# Altium PCB Beetech NanoEvery.PcbDoc
Units mm, origin at the board's own origin, x right, y up, seen from the top; angles counter-clockwise.
Board outline 67.5 x 47.7 mm, 2 copper layers (Top Layer, Bottom Layer), stack 1.671 mm thick; 17 components, 22 nets, 113 pads, 19 vias.
Unrouted connection lines stored in the file: 173.
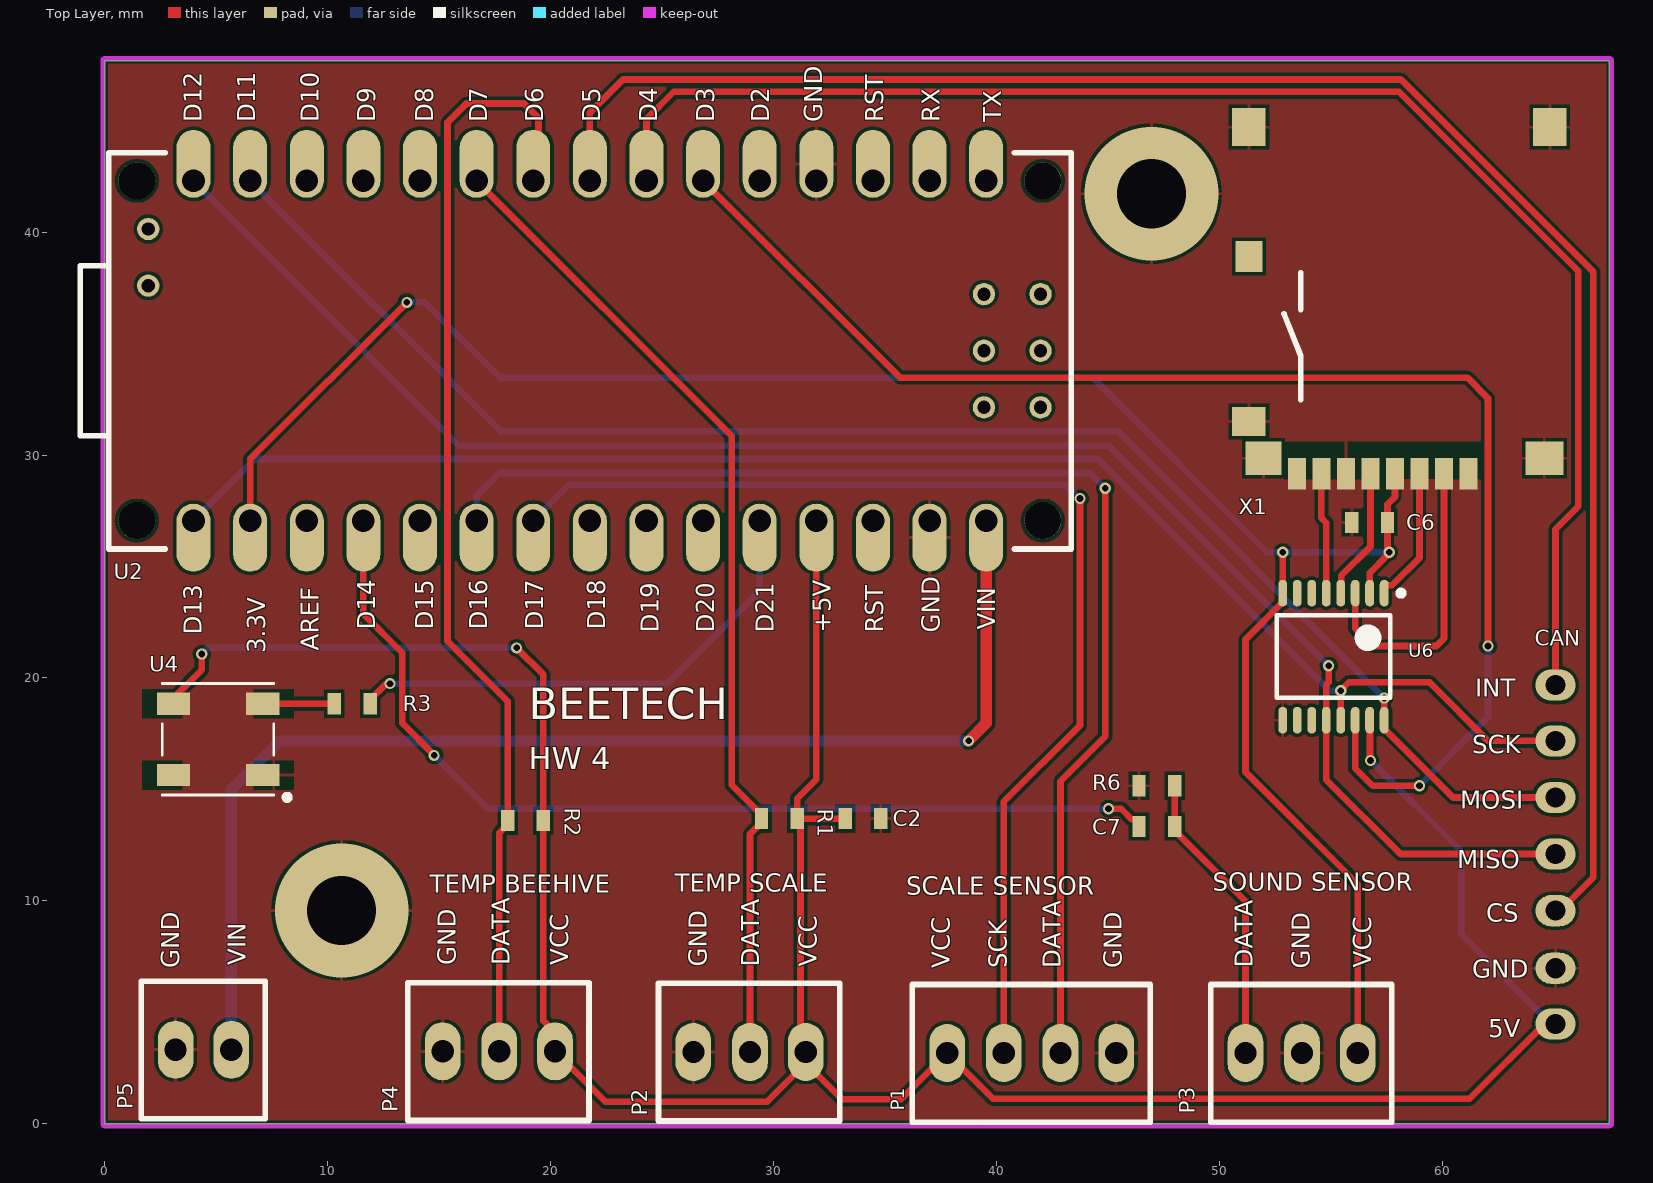
[diagram p0: Top Layer view]
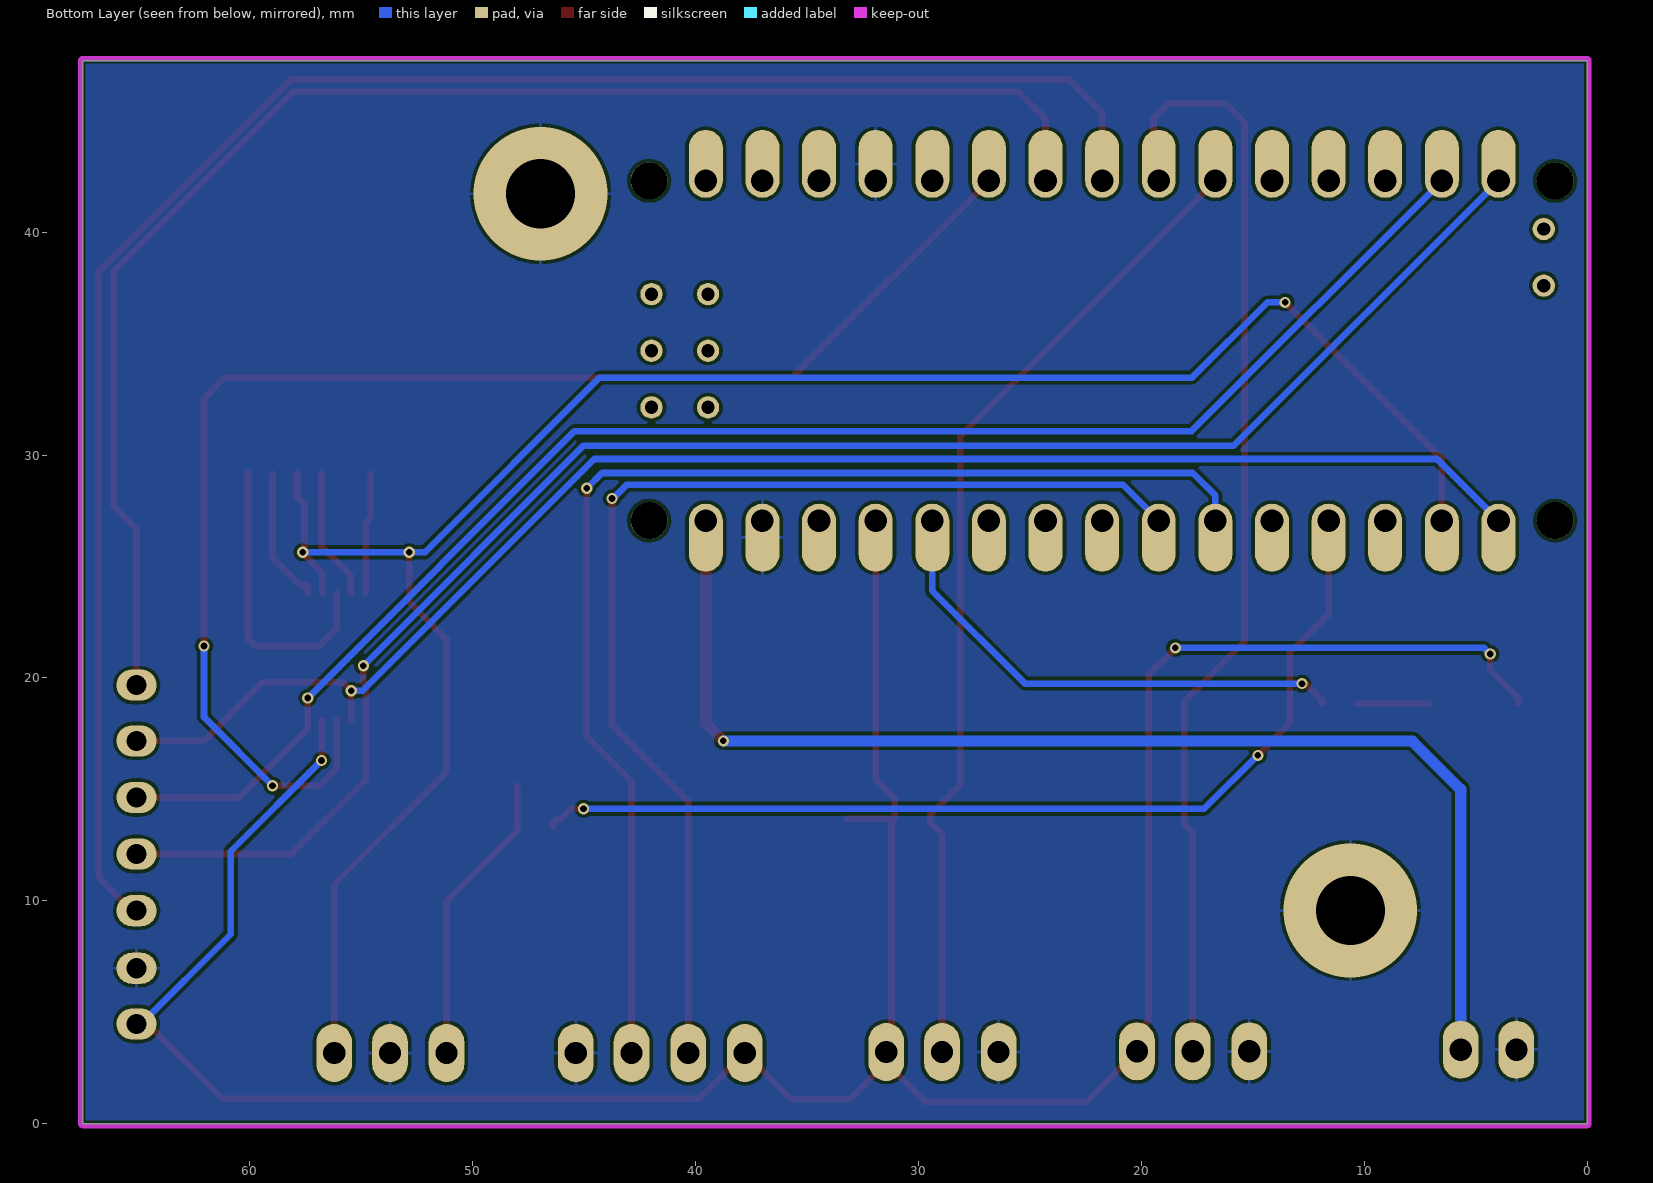
[diagram p1: Bottom Layer view, seen from below]

## Layer stack, top to bottom
Top Solder: solder mask 0.0102, Solder Resist, Dk 3.5
Top Layer: signal copper 0.0356
Dielectric1: core 1.6, FR-4, Dk 4.8
Bottom Layer: signal copper 0.0356
Bottom Solder: solder mask 0.0102, Solder Resist, Dk 3.5

## Board outline
0,0 67.5,0 67.5,47.7 0,47.7

## Design rules (kind name [scope] priority, off if disabled: settings)
Clearance Clearance_1 [InNamedPolygon('SW_L01_P024')] p1: gap=0.254 ignorepadtopadclearanceinfootprint=FALSE except(0: Arc-Hole Track-Hole SMDPad-Hole THPad-Hole Via-Hole Fill-Hole Poly-Hole Region-Hole Text-Hole)
Clearance [All] p2: gap=0.15 ignorepadtopadclearanceinfootprint=FALSE
ComponentClearance [All] p1: gap=0.001 collisioncheckmode=3 verticalgap=0.254 showdistances=FALSE
FabricationTestPointUsage [All] p1 off: valid=0 allowmultiple=FALSE
FabricationTestpoint [All] p1 off: side=3 testpointundercomponent=TRUE minsize=1.016 maxsize=2.54 preferedsize=1.524 minholesize=0 maxholesize=1.016 preferedholesize=0.813 testpointgrid=0.025 allowsidetop=TRUE allowsidebottom=TRUE usegrid=TRUE gridtolerance=0
HoleSize [All] p1: absolutevalues=TRUE maxlimit=6 minlimit=0.025 maxpercent=80.000 minpercent=20.000
HoleToHoleClearance [All] p1: gap=0 allowstackedmicrovias=TRUE
MinimumSolderMaskSliver [All] p1: minsoldermaskwidth=0
PolygonConnect PolygonConnect_14 [All vs IsNamedPolygon('GND_L01_P041')] p1: connectstyle=Relief reliefconductorwidth=0.15 reliefentries=4 polygonreliefangle="90 Angle" airgapwidth=0.15
PolygonConnect V_BAT_L01_P036 [All vs IsNamedPolygon('V_BAT_L01_P036')] p2: connectstyle=Direct reliefconductorwidth=0.254 reliefentries=4 polygonreliefangle="90 Angle" airgapwidth=0.254
PolygonConnect V_BAT2 [All vs IsNamedPolygon('V_BAT2_L01_P004')] p3: connectstyle=Direct reliefconductorwidth=0.254 reliefentries=4 polygonreliefangle="90 Angle" airgapwidth=0.254
PolygonConnect V_BAT [All vs IsNamedPolygon('V_BAT_L01_P010')] p4: connectstyle=Direct reliefconductorwidth=0.254 reliefentries=4 polygonreliefangle="90 Angle" airgapwidth=0.254
PolygonConnect V_SYS2 [All vs IsNamedPolygon('V_SYS2_L01_P012')] p5: connectstyle=Direct reliefconductorwidth=0.254 reliefentries=4 polygonreliefangle="90 Angle" airgapwidth=0.254
PolygonConnect +3.3b_uBlox [All vs IsNamedPolygon('+3.3V_UBLOX_L01_P014')] p6: connectstyle=Direct reliefconductorwidth=0.254 reliefentries=4 polygonreliefangle="90 Angle" airgapwidth=0.254
PolygonConnect V_LIPO_SYS_L01_P016 [All vs IsNamedPolygon('V_LIPO_SYS_L01_P016')] p7: connectstyle=Direct reliefconductorwidth=0.254 reliefentries=4 polygonreliefangle="90 Angle" airgapwidth=0.254
PolygonConnect V_LIPO_SYS_L01_P020 [All vs IsNamedPolygon('V_LIPO_SYS_L02_P020')] p8: connectstyle=Direct reliefconductorwidth=0.254 reliefentries=4 polygonreliefangle="90 Angle" airgapwidth=0.254
PolygonConnect V_SYS_L02_P024 [All vs IsNamedPolygon('V_SYS_L02_P024')] p9: connectstyle=Direct reliefconductorwidth=0.254 reliefentries=4 polygonreliefangle="90 Angle" airgapwidth=0.254
PolygonConnect VCC_USB_5.0V_L01_P026 [All vs IsNamedPolygon('VCC_USB_5.0V_L01_P026')] p10: connectstyle=Direct reliefconductorwidth=0.254 reliefentries=4 polygonreliefangle="90 Angle" airgapwidth=0.254
PolygonConnect SW [All vs IsNamedPolygon('SW_L01_P008')] p11: connectstyle=Direct reliefconductorwidth=0.254 reliefentries=4 polygonreliefangle="90 Angle" airgapwidth=0.254
PolygonConnect [All] p12: connectstyle=Relief reliefconductorwidth=0.15 reliefentries=4 polygonreliefangle="90 Angle" airgapwidth=0.15
RoutingVias [All] p1: holewidth=0.3 width=0.5 viastyle="Through Hole" minholewidth=0.2 minwidth=0.3 maxholewidth=1.2 maxwidth=2 useviatemplates=TRUE viatemplateguid#1={68F519FB-439D-452A-8ACF-2DE296BA9197} viatemplateguid#2={5ED9683F-E5DF-4E78-BDB1-49E541A8EC46} viatemplateguid#3={FAFF2F81-81C9-46E2-9D3D-D8AEF9417303} viatemplateguid#4={175E6F9D-763D-42D4-A59E-C21ACC7DA2E1} viatemplatename#1=v50h30m0mx0 viatemplatename#2=v50h30m50mx0 viatemplatename#3=v50h20 viatemplatename#4=v50h20mx0
SilkToSilkClearance [All] p1: silktosilkclearance=0.152
SilkToSolderMaskClearance [IsPad] p1: minsilkscreentomaskgap=0.127 clearancetoexposedcopper=TRUE
SolderMaskExpansion [All] p1: expansion=0.102 istentingtop=FALSE
Width [All] p1: maxlimit=5.08 minlimit=0.01 preferedwidth=0.305 minimp=50.000000 maximp=50.000000 favimp=50.000000
22 further rules are at their usual default settings.

## Components (designator, comment, footprint, x,y, rotation, side; value= is the part's Value field where it differs from the comment)
C2 "100nF 0603_1" "CAP 0603" 34.011,13.691 r180 top value=100nF
C6 "10uF 0603" "CAP 0603" 56.743,26.975 r0 top value=10uF
C7 "100nF 0603" "CAP 0603" 47.193,13.335 r0 top value=100nF
CAN "8-Pin" 7PIN 65.075,4.48 r180 top locked (schematic designator P7)
P1 "4-Pin Right Angle Housing" "4PIN - RND 205-EK254-2.54-04P" 45.369,3.175 r270 top
P2 "3-Pin Right Angle Housing" "3PIN - RND 205-EK254-2.54-03P" 31.444,3.225 r270 top
P3 "3-Pin Right Angle Housing" "3PIN - RND 205-EK254-2.54-03P" 56.209,3.175 r270 top
P4 "3-Pin Right Angle Housing" "3PIN - RND 205-EK254-2.54-03P" 20.197,3.25 r270 top
P5 "2-Pin Right Angle Housing" "2PIN - RND 205-EK254-2.54-02P" 5.675,3.327 r270 top
R1 "4.7k Ohm 0603" "RES 0603 FOOTPRINT" 30.261,13.691 r180 top value=4.7k
R2 "4.7k Ohm 0603" "RES 0603 FOOTPRINT" 18.875,13.6 r180 top value=4.7k
R3 "470 Ohm 0603" "RES 0603 FOOTPRINT" 11.1,18.847 r180 top value=470
R6 "20k Ohm 0603" "RES 0603 FOOTPRINT" 47.193,15.164 r0 top value=20k
U2 "Arduino Nano Every" "Arduino Nano Every" 0.17,25.79 r0 top locked
U4 "neoPixel" "neoPixel 5050 adafruit 1655" 5.08,17.247 r0 top
U6 "TXB0106" TSSOP-16L 55.118,20.955 r270 top locked
X1 "SD micro Card Holder_2" "SD Card Holder - micro - 2 - sd Card inserted" 52.077,45.559 r0 top locked

## Footprints (in the part's own frame and the unit in brackets; to place one, negate y for a bottom-side part, rotate by r counter-clockwise, add the part's x,y. Pads: shape width x height; smd on the part's side, far side on the other; paste and mask are expansions set on the pad)
"2PIN - RND 205-EK254-2.54-02P" [mm] "RND 205-EK254-2.54-02P"
  oval 2.6x1.6 hole 1: 1(0,0) 2(0,-2.5)
  silkscreen extent -3.07,-4.04 3.1,1.52, body extent -3.1,-3.99 3.1,1.55, height 8.51
"3PIN - RND 205-EK254-2.54-03P" [mm] "RND 205-EK254-2.54-03P"
  oval 2.6x1.6 hole 1: 1(0,0) 2(0,-2.5) 3(0,-5.04)
  silkscreen extent -3.07,-6.6 3.1,1.52, body extent -3.1,-6.55 3.1,1.53, height 8.51
"4PIN - RND 205-EK254-2.54-04P" [mm] "RND 205-EK254-2.54-04P"
  oval 2.6x1.6 hole 1: 1(0,0) 2(0,-2.5) 3(0,-5.04) 4(0,-7.58)
  silkscreen extent -3.07,-9.14 3.1,1.52, body extent -3.1,-9.1 3.1,1.52, height 8.51
7PIN [mm]
  oval 1.8x1.4 hole 0.9: 1(0,0) 2(0,-2.5) 3(0,-5.08) 4(0,-7.62) 5(0,-10.16) 6(0,-12.7) 7(0,-15.2)
"Arduino Nano Every" [mil] "Arduino Nano Every"
  oval 60x120 hole 40 copper offset 0,-30: 1(150,50) 2(250,50) 3(350,50) 4(450,50) 5(550,50) 6(650,50) 7(750,50) 8(850,50) 9(950,50) 10(1050,50) 11(1150,50) 12(1250,50) 13(1350,50) 14(1450,50) 15(1550,50)
  oval 60x120 hole 40 copper offset 0,30: 16(1550,650) 16(1550,650) 17(1450,650) 18(1350,650) 19(1250,650) 20(1150,650) 21(1050,650) 22(950,650) 23(850,650) 24(750,650) 25(650,650) 26(550,650) 27(450,650) 28(350,650) 29(250,650) 30(150,650)
  round 39.37 hole 23.62: 50(70,565) 51(70,465) 61(1545.98,250) 62(1645.98,250) 63(1545.98,350) 64(1645.98,350) 65(1545.98,450) 66(1645.98,450)
  round 65 hole 65 unplated: MH1(50,650) MH2(50,50) MH3(1650,50) MH4(1650,650)
  silkscreen extent -50,0 1700,700, body extent -40,0 1700,700, height 136
"CAP 0603" [mm] "CAP 0603"
  rect 0.6x0.95 smd: 1(-0.8,0) 2(0.8,0)
  body extent -0.8,-0.4 0.8,0.4, height 0.8
"neoPixel 5050 adafruit 1655" [mm] "neoPixel 5050 adafruit 1655"
  rect 1.5x1 smd: 1(2,-1.6) 2(2,1.6) 3(-2,1.6) 4(-2,-1.6)
  silkscreen extent -2.5,-2.72 3.22,2.5, body extent -2.5,-2.5 2.5,2.5, height 2
"RES 0603 FOOTPRINT" [mm] "RES 0603 FOOTPRINT"
  rect 0.6x0.95 smd: 1(-0.8,0) 2(0.8,0)
  body extent -0.8,-0.4 0.8,0.4, height 0.8
"SD Card Holder - micro - 2 - sd Card inserted" [mm] "micro SD Card holder, Molex Part Number:   502774-0891"
  rect 0.8x1.4 smd: 1(9.1,-16.4) 2(8,-16.4) 3(6.9,-16.4) 4(5.8,-16.4) 5(4.7,-16.4) 6(3.6,-16.4) 7(2.5,-16.4) 8(1.4,-16.4)
  rect 1.2x1.4 smd: 10(-0.75,-6.65)
  rect 1.5x1.3 smd: 20(-0.75,-14.05)
  rect 1.5x1.7 smd: 20(-0.75,-0.85) 20(12.75,-0.85)
  rect 1.6x1.5 smd: 20(-0.1,-15.7)
  rect 1.7x1.5 smd: 20(12.5,-15.7)
  silkscreen extent 0.82,-13.08 1.57,-7.37, body extent -1,-16.1 13.3,2.2, height 1.81
TSSOP-16L [mm] "TSOP, 16-Leads, Body 5,00x4,40mm, Pitch 0,65mm, IPC High Density"
  oval 1.2x0.4 smd: 1(-2.85,2.275) 2(-2.85,1.625) 3(-2.85,0.975) 4(-2.85,0.325) 5(-2.85,-0.325) 6(-2.85,-0.975) 7(-2.85,-1.625) 8(-2.85,-2.275) 9(2.85,-2.275) 10(2.85,-1.625) 11(2.85,-0.975) 12(2.85,-0.325) 13(2.85,0.325) 14(2.85,0.975) 15(2.85,1.625) 16(2.85,2.275)
  silkscreen extent -2.97,-2.55 1.85,3.15, body extent -2.25,-2.55 2.25,2.55, height 1.2

## Part data
C2 C6 C7: "C CERAMIC SMD", Bezeichnung="C SMD", Haendler=Mouser, housing/footprint=0603
  C2: Haendler Nr=603-CC0603JPX79BB104, Hersteller=Yageo, Hersteller Nr=CC0603JPX7R9BB104, Preis (CHF)=0.15, Umax=50V
  C6: Dielektrikum=X5R, Haendler Nr=810-C1608X5R1A106K, Hersteller=TDK, Hersteller Nr=C1608X5R1A106K080AC, Preis (CHF)=0.5, Umax=10V
  C7: Haendler Nr=710-885012206020, Hersteller=Würth, Hersteller Nr=885012206020, Preis (CHF)=0.05, Umax=10V
CAN: library part 7-Pin, LatestRevisionDate=17-Jul-2002, LatestRevisionNote="Re-released for DXP Platform.", Publisher="Altium Limited"
P1: library part "4-Pin Screw Terminal", "4-Pin", ComponentLink1Description=Mouser, ComponentLink1URL=https://www.mouser.ch/ProductDetail/TE-Connectivity/640453-2?qs=sGAEpiMZZMs%252bGHln7q6pm5E1Eb6qwPl2KIU5TYv3tVY%3d, Haendler=Distrelec, Haendler Nr=301-27-920, Hersteller=RND, Hersteller Nr="RND 205-EK254-2.54-04P", Preis (CHF)=0.60
P2 P3 P4: library part "3-Pin Screw Terminal", "3-Pin", ComponentLink1Description=Mouser, ComponentLink1URL=https://www.mouser.ch/ProductDetail/TE-Connectivity/640453-2?qs=sGAEpiMZZMs%252bGHln7q6pm5E1Eb6qwPl2KIU5TYv3tVY%3d, Haendler=Distrelec, Haendler Nr=301-27-919, Preis (CHF)=0.60
P5: library part "2-Pin Screw Terminal", "2-Pin", ComponentLink1Description=Mouser, ComponentLink1URL=https://www.mouser.ch/ProductDetail/TE-Connectivity/640453-2?qs=sGAEpiMZZMs%252bGHln7q6pm5E1Eb6qwPl2KIU5TYv3tVY%3d, Haendler=Distrelec, Haendler Nr=301-27-918, Preis (CHF)=0.60
R1 R2 R3 R6: "R SMD", Bezeichnung="R SMD", Haendler=Mouser, housing/footprint=0603
  R1 R2: Haendler Nr=755-ESR03EZPF4701, Preis (CHF)=0.01
  R3: Haendler Nr=594-MCT06030C4700FP5, Preis (CHF)=0.15
  R6: Haendler Nr=71-CRCW060320K0FKEAC, Preis (CHF)=0.09
U2: "https://store.arduino.cc/nano-every-pack", ComponentLink3URL=http://ch.farnell.com/stmicroelectronics/stm32l496vgt6/mcu-arm-cortex-m4-80mhz-lqfp-100/dp/2725139?st=STM32L496VGT6, Haendler=Mouser, Haendler Nr=782-ABX00028, link=https://store.arduino.cc/nano-every-pack, Link 2=https://www.mouser.ch/ProductDetail/Arduino/ABX00028?qs=PzGy0jfpSMtit6rnFl8mVg%3D%3D, Preis (CHF)=11.21
U4: library part "neoPixel 5050 adafruit 1655", "neoPixel 5050 adafruit 1655", ComponentLink1Description=Mouser, ComponentLink1URL=https://www.mouser.ch/ProductDetail/TE-Connectivity/640453-2?qs=sGAEpiMZZMs%252bGHln7q6pm5E1Eb6qwPl2KIU5TYv3tVY%3d, Haendler=Mouser, Haendler Nr=485-1655, Hersteller=Adafruit, Hersteller Nr=1655, Preis (CHF)=0.60
U6: library part "TXB0106 Level Converter", "Level Converter TXB0106", Haendler=Mouser, Haendler2=Farnell, Haendler2 Nr=1694679, Haendler Nr=595-TXB0106PWR, Hersteller="Texas Instruments", Hersteller Nr=TXB0106, link=http://ch.farnell.com/texas-instruments/txb0106pwr/txb-transceiver-tssop16/dp/1694679?ost=1694679&searchView=table&iscrfnonsku=false&ddkey=http%3Ade-CH%2FElement14_Switzerland%2Fsearch, Preis (CHF)=1.45
X1: "SD micro Card  Holder", Haendler=Mouser, Haendler2=Farnell, Haendler2 Nr=2064063, Haendler Nr=538-502774-0891, Hersteller=Molex, Hersteller Nr=502774-0891, Preis (CHF)=3.15

## Via types
v1: diameter 0.5, hole 0.3, Top Layer to Bottom Layer, tented both sides, 17 vias
v2: diameter 6, hole 3.1, Top Layer to Bottom Layer, 2 vias

## Nets (pads, with @x,y where several pads share a name; then routed paths per layer and width w, separated by ;. In a path a pad name is that pad's centre, name@x,y a point inside that pad or via, vN(x,y) a via of type N, cw(c..) or ccw(c..) an arc to the next point about the centre after c; other vN are vias at no path point)
"CS CAN": CAN.3 U2.23 | length 81.7
  Top Layer w0.3: U2.23 21.76,45.36 23.25,46.85 58.14,46.85 66.775,38.215 66.775,11.06 65.275,9.56 CAN.3
"CS SD 5V": U2.21 U6.14 | length 63.3
  Top Layer w0.3: U2.21 35.665,33.475 61.125,33.475 62.054,32.546 v1(62.054,21.432) ; U6.14 56.093,15.944 56.874,15.164 v1(58.974,15.164)
  Bottom Layer w0.3: v1(58.974,15.164) 62.054,18.243 v1(62.054,21.432)
"CS SD CARD 3.3V": U6.3 X1.2 | length 13.5
  Top Layer w0.3: U6.3 56.093,22.227 56.888,21.432 59.732,21.432 60.077,21.777 X1.2@60.077,29.209
DATA_TEMP_1: P2.2 R1.2 U2.25 | length 46.4
  Top Layer w0.3: U2.25@16.68,44.13 U2.25 28.125,30.855 28.125,15.202 29.461,13.866 R1.2 29.461,13.516 28.944,12.999 P2.2
DATA_TEMP_2: P4.2 R2.2 U2.24 | length 50.6
  Top Layer w0.3: P4.2 17.697,13.047 18.075,13.425 R2.2 18.075,18.95 15.375,21.65 15.375,44.925 16.225,45.775 18.805,45.775 19.454,45.126 19.454,42.534 U2.24
DT_HX711: P1.2 U2.6 | length 56.2
  Top Layer w0.3: P1.2 42.869,15.369 44.882,17.382 v1(44.882,28.509)
  Bottom Layer w0.3: U2.6 16.68,28.185 17.695,29.2 44.191,29.2 v1(44.882,28.509)
GND: C2.1 C6.1 CAN.2 P1.1 P2.3 P3.2 P4.3 P5.2 R6.1 U2.14 U2.19 U4.1 U6.9 X1.6 X1.20
  other v2: 10.625,9.575 46.95,41.725
"INT CAN": CAN.7 U2.22 | length 67.4
  Top Layer w0.3: U2.22 24.3,45.075 25.525,46.3 58.054,46.3 66.1,38.254 66.1,27.7 65.075,26.675 CAN.7
MISO: CAN.4 U2.30 U6.12 | length 76.8
  Top Layer w0.3: v1(54.9,20.55) 54.9,19.807 54.793,19.7 U6.12 54.793,15.432 58.125,12.1 CAN.4
  Bottom Layer w0.3: U2.30 15.855,30.425 45.025,30.425 v1(54.9,20.55)
"MISO 3.3V": U6.5 X1.7 | length 5.4
  Top Layer w0.3: X1.7 54.577,27.183 54.793,26.967 U6.5
MOSI: CAN.5 U2.29 U6.16 | length 70.8
  Top Layer w0.3: v1(57.393,19.105) 57.393,17.732 60.485,14.64 CAN.5
  Bottom Layer w0.3: U2.29 17.745,31.075 45.423,31.075 v1(57.393,19.105)
"MOSI 3.3V": U6.1 X1.3 | length 6.2
  Top Layer w0.3: U6.1 57.393,24.118 57.439,24.165 57.753,24.165 58.977,25.389 X1.3
NEO_PIX_DATA: R3.1 U2.11 | length 22.8
  Top Layer w0.3: R3.1 11.9,19.022 12.586,19.708 12.756,19.708 v1(12.794,19.747)
  Bottom Layer w0.3: v1(12.794,19.747) 25.216,19.747 29.38,23.911 U2.11
NetC7_2: C7.2 P3.3 R6.2 | length 13.3
  Top Layer w0.3: R6.2 C7.2 47.993,13.16 51.169,9.984 P3.3
NetR3_2: R3.2 U4.2 | length 3.2
  Top Layer w0.3: U4.2 R3.2
SCK: CAN.6 U2.1 U6.13 | length 69.1
  Top Layer w0.3: U6.13 v1(55.443,19.425) 55.443,19.446 55.804,19.807 59.427,19.807 62.054,17.18 CAN.6
  Bottom Layer w0.3: U2.1 6.745,29.825 44.543,29.825 54.943,19.425 v1(55.443,19.425)
"SCK 3.3V": U6.4 X1.5 | length 5.9
  Top Layer w0.3: U6.4 55.462,23.824 55.462,24.584 56.777,25.899 X1.5
SCK_HX711: P1.3 U2.7 | length 51.7
  Top Layer w0.3: P1.3 40.329,14.452 43.75,17.873 v1(43.75,28.05)
  Bottom Layer w0.3: U2.7 20.835,28.675 43.071,28.675 43.696,28.05 v1(43.75,28.05)
SOUND_DATA: C7.1 U2.4 | length 44.9
  Top Layer w0.3: U2.4 11.6,22.875 13.344,21.131 13.344,17.974 14.772,16.547 v1(14.772,16.53) ; v1(45.025,14.132) 45.596,14.132 46.068,13.66 46.243,13.66 46.393,13.51 C7.1
  Bottom Layer w0.3: v1(14.772,16.53) 14.789,16.53 17.187,14.132 v1(45.025,14.132)
"V IN": P5.1 U2.15 | length 55.9
  Top Layer w0.5: v1(38.75,17.18) 39.54,17.97 U2.15
  Bottom Layer w0.5: P5.1 5.675,15.006 7.849,17.18 v1(38.75,17.18)
"VCC 3.3V": C6.2 P3.1 U2.2 U6.2 U6.8 X1.4 | length 92.4
  Top Layer w0.3: U2.2 6.52,29.82 v1(13.55,36.85) ; v1(52.843,25.64) U6.8 52.843,23.405 51.169,21.731 51.169,15.786 56.209,10.746 P3.1 ; U6.2 56.743,24.718 v1@57.543,25.518 ; v1@57.543,25.64 C6.2 57.543,27.793 57.877,28.127 X1.4@57.877,29.209
  Bottom Layer w0.3: v1(13.55,36.85) 14.35,36.85 17.725,33.475 44.3,33.475 52.135,25.64 v1(52.843,25.64) v1(57.622,25.64)
"VCC 5V": C2.2 CAN.1 P1.4 P2.1 P4.1 R1.1 R2.1 U2.12 U4.3 U6.15 | length 130.4
  Top Layer w0.3: U4.3 3.08,19.097 4.35,20.367 v1(4.35,21.075) ; v1(18.475,21.35) 19.675,20.15 R2.1 19.675,4.624 20.197,4.102 P4.1 20.197,3.102 20.798,2.501 20.946,2.501 22.457,0.991 29.71,0.991 P2.1@31.444,2.725 ; U2.12 31.92,15.456 31.061,14.597 R1.1 ; C2.2 R1.1 ; P1.4 P1.4@37.789,3.027 ; U6.15 56.76,18.088 56.76,16.317 v1(56.777,16.3) ; CAN.1 64.58,4.48 61.225,1.125 39.839,1.125 38.538,2.426 38.39,2.426 P1.4@37.789,3.027 ; R1.1 31.211,13.541 31.211,3.458 P2.1 P2.1@31.444,2.725 ; P2.1@31.444,2.725 33.069,1.1 35.714,1.1 37.041,2.426 37.189,2.426 P1.4@37.789,3.027
  Bottom Layer w0.3: v1(4.35,21.075) 4.625,21.35 v1(18.475,21.35) ; v1(56.777,16.3) 60.85,12.227 60.85,8.505 64.875,4.48 CAN.1
pads on no net: U2.3 U2.5 U2.8 U2.9 U2.10 U2.13 U2.16 U2.17 U2.18 U2.20 U2.26 U2.27 U2.28 U2.50 U2.51 U2.61 U2.62 U2.63 U2.64 U2.65 U2.66 U2.MH1 U2.MH2 U2.MH3 U2.MH4 U4.4 U6.6 U6.7 U6.10 U6.11 X1.1 X1.8 X1.10

## Polygon pours and split planes (outlines as drawn)
GND on Top Layer "GND_L01_P002" (solid, pour order 2): 0,0 67.5,0 67.5,47.7 0,47.7
no net on Bottom Layer "NONET_L02_P004" (solid, pour order 4): 0,0 67.5,0 67.5,47.7 0,47.7
GND on Bottom Layer "GND_L02_P003" (solid, pour order 3): 0,0 67.5,0 67.5,47.7 0,47.7

## Keep-outs
Keep-Out Layer:
  lines w0.2: -0.1,0 ccw(c0,0) 0,-0.1 ; -0.1,0 ccw(c0,0) 0,-0.1 ; -0.1,0 -0.1,47.7 ; -0.1,47.7 cw(c0,47.7) 0,47.8 ; -0.1,47.7 cw(c0,47.7) 0,47.8 ; 0,-0.1 67.5,-0.1 ; 0,47.8 67.5,47.8 ; 67.5,-0.1 ccw(c67.5,0) 67.6,0 ; 67.5,-0.1 ccw(c67.5,0) 67.6,0 ; 67.5,47.8 cw(c67.5,47.7) 67.6,47.7 ; 67.5,47.8 cw(c67.5,47.7) 67.6,47.7 ; 67.6,0 67.6,47.7

## Silkscreen, mask and mechanical layers (free items; w line width, h text height)
Top Overlay:
  text "D12" at 4.35,44.925 h0.8 r90
  text "D11" at 6.745,44.925 h0.8 r90
  text "D10" at 9.6,44.925 h0.8 r90
  text "D9" at 12.125,44.925 h0.8 r90
  text "D8" at 14.725,44.925 h0.8 r90
  text "D7" at 17.15,44.925 h0.8 r90
  text "D6" at 19.675,44.925 h0.8 r90
  text "D5" at 22.225,44.925 h0.8 r90
  text "D4" at 24.775,44.925 h0.8 r90
  text "D3" at 27.35,44.925 h0.8 r90
  text "D2" at 29.8,44.925 h0.8 r90
  text "GND" at 32.175,44.925 h0.8 r90
  text "RST" at 34.925,44.925 h0.8 r90
  text "RX" at 37.45,44.925 h0.8 r90
  text "TX" at 40.225,44.925 h0.8 r90
  text "D14" at 12.125,22.158 h0.8 r90
  text "D15" at 14.725,22.158 h0.8 r90
  text "D16" at 17.15,22.158 h0.8 r90
  text "D17" at 19.675,22.158 h0.8 r90
  text "D18" at 22.457,22.158 h0.8 r90
  text "VIN" at 39.95,22.158 h0.8 r90
  text "D19" at 24.84,22.025 h0.8 r90
  text "D20" at 27.35,22.025 h0.8 r90
  text "D21" at 30,22.025 h0.8 r90
  text "+5V" at 32.575,22.025 h0.8 r90
  text "RST" at 34.925,22.025 h0.8 r90
  text "GND" at 37.45,22.025 h0.8 r90
  text "D13" at 4.35,21.938 h0.8 r90
  text "AREF" at 9.6,21.225 h0.8 r90
  text "3.3V" at 7.199,21.109 h0.8 r90
  text "INT" at 61.475,19.15 h0.8
  text "BEETECH" at 19.026,18.15 h1.4
  text "SCK" at 61.341,16.625 h0.8
  text "HW 4" at 19.021,15.904 h1
  text "MOSI" at 60.808,14.132 h0.8
  text "MISO" at 60.675,11.475 h0.8
  text "SOUND SENSOR" at 49.705,10.45 h0.8
  text "TEMP SCALE" at 25.575,10.4 h0.8
  text "TEMP BEEHIVE" at 14.575,10.375 h0.8
  text "SCALE SENSOR" at 35.95,10.275 h0.8
  text "CS" at 61.974,9.075 h0.8
  text "VIN" at 6.326,7.122 h0.8 r90
  text "GND" at 15.744,7.122 h0.8 r90
  text "DATA" at 18.169,7.122 h0.8 r90
  text "VCC" at 20.794,7.122 h0.8 r90
  text "GND" at 26.994,7.047 h0.8 r90
  text "DATA" at 29.349,7.047 h0.8 r90
  text "VCC" at 31.944,7.047 h0.8 r90
  text "DATA" at 51.5,7 h0.8 r90
  text "GND" at 3.329,6.983 h0.8 r90
  text "VCC" at 56.819,6.997 h0.8 r90
  text "VCC" at 37.894,6.972 h0.8 r90
  text "SCK" at 40.469,6.972 h0.8 r90
  text "DATA" at 42.894,6.972 h0.8 r90
  text "GND" at 45.619,6.972 h0.8 r90
  text "GND" at 54.043,6.95 h0.8 r90
  text "GND" at 61.341,6.55 h0.8
  text "5V" at 62.054,3.875 h0.8